# Altium PCB LED板10通道.PcbDoc
Units mm, origin at the board's own origin, x right, y up, seen from the top; angles counter-clockwise.
Board outline 195 x 30 mm, 2 copper layers (Top Layer, Bottom Layer); 71 components, 62 nets, 206 pads, 21 vias.
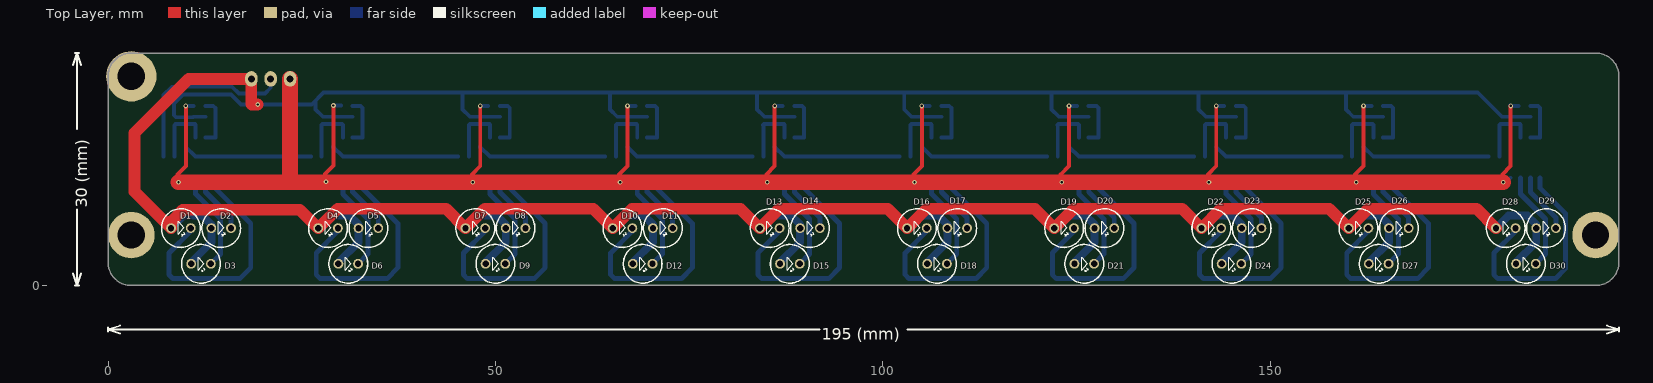
[diagram p0: Top Layer view]
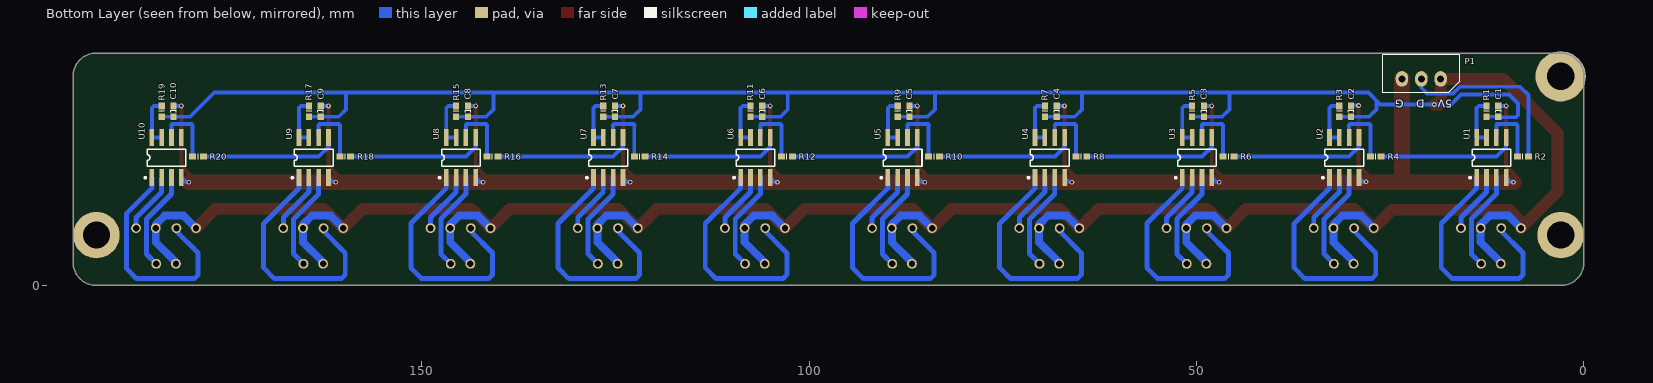
[diagram p1: Bottom Layer view, seen from below]
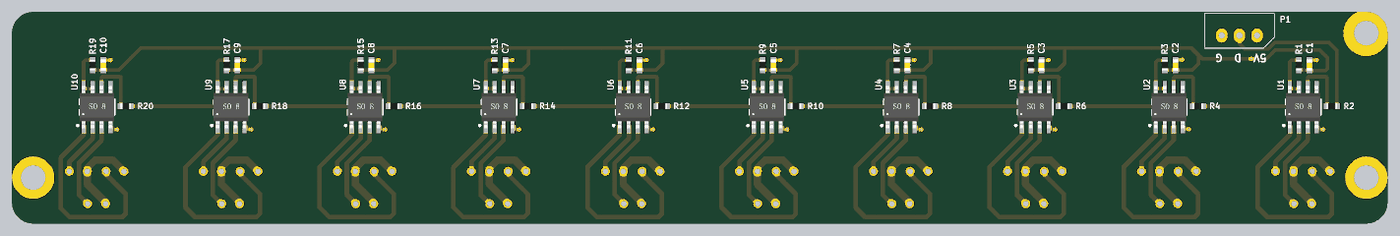
[diagram p2: 3D render of the assembled board from below, using the file's embedded part models]

## Layer stack, top to bottom
Top Solder: solder mask 0.0102, Solder Resist, Dk 3.5
Top Layer: signal copper 0.0356
Dielectric1: dielectric 0.32, FR-4, Dk 4.8
Bottom Layer: signal copper 0.0356
Bottom Solder: solder mask 0.0102, Solder Resist, Dk 3.5

## Board outline
0,3 ccw(c3,3) 3,0 192,0 ccw(c192,3) 195,3 195,27 ccw(c192,27) 192,30 3,30 ccw(c3,27) 0,27

## Design rules (kind name [scope] priority, off if disabled: settings)
Clearance [All] p1: gap=0.254
ComponentClearance [All] p1 off: gap=0.254 collisioncheckmode=3 verticalgap=0.254 showdistances=FALSE
PolygonConnect [All] p1: connectstyle=Direct reliefconductorwidth=0.254 reliefentries=4 polygonreliefangle="90 Angle" airgapwidth=0.254
RoutingVias [All] p1: holewidth=0.711 width=1.27 viastyle="Through Hole" minholewidth=0.711 minwidth=1.27 maxholewidth=0.711 maxwidth=1.27
SilkToSolderMaskClearance SilkscreenOverComponentPads [IsPad] p1: minsilkscreentomaskgap=0.254 clearancetoexposedcopper=TRUE
SolderMaskExpansion [All] p1: expansion=0.102
Width [All] p1: maxlimit=2.54 minlimit=0.203 preferedwidth=0.381
28 further rules are at their usual default settings.

## Components (designator, comment, footprint, x,y, rotation, side; value= is the part's Value field where it differs from the comment)
C1 "100nF" 1608C 11.049,22.479 r270 bottom
C2 "100nF" 1608C 30.049,22.479 r270 bottom (schematic designator C1)
C3 "100nF" 1608C 49.049,22.479 r270 bottom (schematic designator C1)
C4 "100nF" 1608C 68.049,22.479 r270 bottom (schematic designator C1)
C5 "100nF" 1608C 87.049,22.479 r270 bottom (schematic designator C1)
C6 "100nF" 1608C 106.049,22.479 r270 bottom (schematic designator C1)
C7 "100nF" 1608C 125.049,22.479 r270 bottom (schematic designator C1)
C8 "100nF" 1608C 144.049,22.479 r270 bottom (schematic designator C1)
C9 "100nF" 1608C 163.049,22.479 r270 bottom (schematic designator C1)
C10 "100nF" 1608C 182.049,22.479 r270 bottom (schematic designator C1)
D1 "" LEDN/5S 9.4,7.4 r90 top
D2 "" LEDN/5S 14.6,7.4 r90 top
D3 "" LEDN/5S 12,2.8 r90 top
D4 "" LEDN/5S 28.4,7.4 r90 top
D5 "" LEDN/5S 33.6,7.4 r90 top
D6 "" LEDN/5S 31,2.8 r90 top
D7 "" LEDN/5S 47.4,7.4 r90 top
D8 "" LEDN/5S 52.6,7.4 r90 top
D9 "" LEDN/5S 50,2.8 r90 top
D10 "" LEDN/5S 66.4,7.4 r90 top
D11 "" LEDN/5S 71.6,7.4 r90 top
D12 "" LEDN/5S 69,2.8 r90 top
D13 "" LEDN/5S 85.4,7.4 r90 top
D14 "" LEDN/5S 90.6,7.4 r90 top
D15 "" LEDN/5S 88,2.8 r90 top
D16 "" LEDN/5S 104.4,7.4 r90 top
D17 "" LEDN/5S 109.6,7.4 r90 top
D18 "" LEDN/5S 107,2.8 r90 top
D19 "" LEDN/5S 123.4,7.4 r90 top
D20 "" LEDN/5S 128.6,7.4 r90 top
D21 "" LEDN/5S 126,2.8 r90 top
D22 "" LEDN/5S 142.4,7.4 r90 top
D23 "" LEDN/5S 147.6,7.4 r90 top
D24 "" LEDN/5S 145,2.8 r90 top
D25 "" LEDN/5S 161.4,7.4 r90 top
D26 "" LEDN/5S 166.6,7.4 r90 top
D27 "" LEDN/5S 164,2.8 r90 top
D28 "" LEDN/5S 180.4,7.4 r90 top
D29 "" LEDN/5S 185.6,7.4 r90 top
D30 "" LEDN/5S 183,2.8 r90 top
P1 "" 5264-3 23.495,26.67 r0 bottom
R1 "33R" 1608 12.573,22.479 r270 bottom
R2 "33R" 1608 7.874,16.637 r180 bottom
R3 "33R" 1608 31.573,22.479 r270 bottom (schematic designator R1)
R4 "33R" 1608 26.874,16.637 r180 bottom (schematic designator R2)
R5 "33R" 1608 50.573,22.479 r270 bottom (schematic designator R1)
R6 "33R" 1608 45.874,16.637 r180 bottom (schematic designator R2)
R7 "33R" 1608 69.573,22.479 r270 bottom (schematic designator R1)
R8 "33R" 1608 64.874,16.637 r180 bottom (schematic designator R2)
R9 "33R" 1608 88.573,22.479 r270 bottom (schematic designator R1)
R10 "33R" 1608 83.874,16.637 r180 bottom (schematic designator R2)
R11 "33R" 1608 107.573,22.479 r270 bottom (schematic designator R1)
R12 "33R" 1608 102.874,16.637 r180 bottom (schematic designator R2)
R13 "33R" 1608 126.573,22.479 r270 bottom (schematic designator R1)
R14 "33R" 1608 121.874,16.637 r180 bottom (schematic designator R2)
R15 "33R" 1608 145.573,22.479 r270 bottom (schematic designator R1)
R16 "33R" 1608 140.874,16.637 r180 bottom (schematic designator R2)
R17 "33R" 1608 164.573,22.479 r270 bottom (schematic designator R1)
R18 "33R" 1608 159.874,16.637 r180 bottom (schematic designator R2)
R19 "33R" 1608 183.573,22.479 r270 bottom (schematic designator R1)
R20 "33R" 1608 178.874,16.637 r180 bottom (schematic designator R2)
U1 "WS2811" so8 11.938,16.51 r90 bottom
U2 "WS2811" so8 30.938,16.51 r90 bottom (schematic designator U1)
U3 "WS2811" so8 49.938,16.51 r90 bottom (schematic designator U1)
U4 "WS2811" so8 68.938,16.51 r90 bottom (schematic designator U1)
U5 "WS2811" so8 87.938,16.51 r90 bottom (schematic designator U1)
U6 "WS2811" so8 106.938,16.51 r90 bottom (schematic designator U1)
U7 "WS2811" so8 125.938,16.51 r90 bottom (schematic designator U1)
U8 "WS2811" so8 144.938,16.51 r90 bottom (schematic designator U1)
U9 "WS2811" so8 163.938,16.51 r90 bottom (schematic designator U1)
U10 "WS2811" so8 182.938,16.51 r90 bottom (schematic designator U1)

## Footprints (in the part's own frame and the unit in brackets; to place one, negate y for a bottom-side part, rotate by r counter-clockwise, add the part's x,y. Pads: shape width x height; smd on the part's side, far side on the other; paste and mask are expansions set on the pad)
1608 [mm]
  rect 0.9x0.8 smd: 1(-0.7,0) 2(0.7,0)
  silkscreen extent 0,-0.35 0,0.35, body extent -0.75,-0.39 0.75,0.41, height 0.45
1608C [mm]
  rect 0.9x0.8 smd: 1(-0.7,0) 2(0.7,0)
  silkscreen extent -0.1,-0.35 0.1,0.36, body extent -0.8,-0.41 0.8,0.39, height 0.8
5264-3 [mm]
  oval 1.6x2 hole 0.9: 1(0,0) 2(-2.5,0) 3(-5,0)
  silkscreen extent -7.45,-3.1 2.45,1.8
LEDN/5S [mil]
  round 50 hole 32: 1(0,50) 2(0,-50)
  silkscreen extent -98,-98 98,98
so8 [mm]
  rect 2.2x0.6 smd: 1(-2.6,1.905) 2(-2.6,0.635) 3(-2.6,-0.635) 4(-2.6,-1.905) 5(2.6,-1.905) 6(2.6,-0.635) 7(2.6,0.635) 8(2.6,1.905)
  silkscreen extent -2.72,-2.5 1.1,2.88, body extent -3.72,-2.42 3.69,2.48, height 1.7

## Part data
C1 C2 C3 C4 C5 C6 C7 C8 C9 C10: library part Cap, "Capacitor"
D1 D2 D3 D4 D5 D6 D7 D8 D9 D10 D11 D12 D13 D14 D15 D16 D17 D18 D19 D20 D21 D22 D23 D24 D25 D26 D27 D28 D29 D30: library part LED
P1: library part "Header 3", "Header, 3-Pin"
R1 R2 R3 R4 R5 R6 R7 R8 R9 R10 R11 R12 R13 R14 R15 R16 R17 R18 R19 R20: library part Res2, "Resistor"
U1 U2 U3 U4 U5 U6 U7 U8 U9 U10: library part "Header 4X2", "Header, 4-Pin, Dual row"

## Free pads (board coordinates)
  round 6 hole 3.5: 0(3,6.5) 0(192,6.5)
  round 6.5 hole 3.5: 0(3,27)

## Via types
v1: diameter 0.61, hole 0.305, Top Layer to Bottom Layer, 21 vias

## Nets (pads, with @x,y where several pads share a name; then routed paths per layer and width w, separated by ;. In a path a pad name is that pad's centre, name@x,y a point inside that pad or via, vN(x,y) a via of type N, cw(c..) or ccw(c..) an arc to the next point about the centre after c; other vN are vias at no path point)
DIN: P1.2 R2.2 | length 24
  Bottom Layer w0.508: R2.2 7.174,24.573 8.255,25.654 16.002,25.654 16.891,24.765 20.233,24.765 20.995,25.527 P1.2
GND: C1.1 C2.1 C3.1 C4.1 C5.1 C6.1 C7.1 C8.1 C9.1 C10.1 P1.1 U1.4 U2.4 U3.4 U4.4 U5.4 U6.4 U7.4 U8.4 U9.4 U10.4 | length 308
  Top Layer w0.508: 8.959,14.351 10.037,15.429 v1(10.037,23.179) ; v1(28.134,13.383) 28.007,13.51 28.007,14.399 29.085,15.477 v1(29.085,23.227) ; v1(47.086,13.335) 46.959,13.462 46.959,14.351 48.037,15.429 v1(48.037,23.179) ; v1(66.086,13.335) 65.959,13.462 65.959,14.351 67.037,15.429 v1(67.037,23.179) ; v1(85.086,13.335) 84.959,13.462 84.959,14.351 86.037,15.429 v1(86.037,23.179) ; v1(104.086,13.335) 103.959,13.462 103.959,14.351 105.037,15.429 v1(105.037,23.179) ; v1(123.086,13.335) 122.959,13.462 122.959,14.351 124.037,15.429 v1(124.037,23.179) ; v1(142.086,13.335) 141.959,13.462 141.959,14.351 143.037,15.429 v1(143.037,23.179) ; v1(161.086,13.335) 160.959,13.462 160.959,14.351 162.037,15.429 v1(162.037,23.179) ; 179.959,14.351 181.037,15.429 v1(181.037,23.179)
  Top Layer w2.032: v1(9.086,13.335) 22.86,13.335 ; P1.1 23.495,13.97 22.86,13.335 ; v1(180.086,13.335) v1(161.086,13.335) v1(142.086,13.335) v1(123.086,13.335) v1(104.086,13.335) v1(85.086,13.335) v1(66.086,13.335) v1(47.086,13.335) 22.86,13.335
  Bottom Layer w0.508: v1(9.086,13.335) 9.458,13.335 U1.4 ; v1(10.037,23.179) C1.1 ; v1(28.134,13.383) 28.506,13.383 U2.4 U2.4@29.081,13.958 ; v1(29.085,23.227) C2.1@30.097,23.227 ; v1(47.086,13.335) 47.458,13.335 U3.4 ; v1(48.037,23.179) C3.1 ; v1(66.086,13.335) 66.458,13.335 U4.4 ; v1(67.037,23.179) C4.1 ; v1(85.086,13.335) 85.458,13.335 U5.4 ; v1(86.037,23.179) C5.1 ; v1(104.086,13.335) 104.458,13.335 U6.4 ; v1(105.037,23.179) C6.1 ; v1(123.086,13.335) 123.458,13.335 U7.4 ; v1(124.037,23.179) C7.1 ; v1(142.086,13.335) 142.458,13.335 U8.4 ; v1(143.037,23.179) C8.1 ; v1(161.086,13.335) 161.458,13.335 U9.4 ; v1(162.037,23.179) C9.1 ; v1(180.086,13.335) 180.458,13.335 U10.4 ; v1@180.975,23.241 v1(181.037,23.179) C10.1
NetD1_2: D1.2 U1.1 | length 32
  Bottom Layer w0.635: D1.2 10.67,6.987 7.874,4.191 7.874,1.397 8.382,0.889 17.018,0.889 18.415,2.286 18.415,8.001 13.843,12.573 U1.1
NetD2_2: D2.2 U1.2 | length 7.9
  Bottom Layer w0.635: U1.2 12.573,12.065 15.87,8.768 D2.2
NetD3_2: D3.2 U1.3 | length 13
  Bottom Layer w0.635: U1.3 11.303,11.811 14.536,8.578 14.536,4.066 D3.2
NetD4_2: D4.2 U2.1 | length 32
  Bottom Layer w0.635: D4.2 29.67,6.987 26.874,4.191 26.874,1.397 27.382,0.889 36.018,0.889 37.415,2.286 37.415,8.001 32.843,12.573 U2.1
NetD5_2: D5.2 U2.2 | length 7.9
  Bottom Layer w0.635: U2.2 31.573,12.065 34.87,8.768 D5.2
NetD6_2: D6.2 U2.3 | length 13
  Bottom Layer w0.635: U2.3 30.303,11.811 33.536,8.578 33.536,4.066 D6.2
NetD7_2: D7.2 U3.1 | length 32
  Bottom Layer w0.635: D7.2 48.67,6.987 45.874,4.191 45.874,1.397 46.382,0.889 55.018,0.889 56.415,2.286 56.415,8.001 51.843,12.573 U3.1
NetD8_2: D8.2 U3.2 | length 7.9
  Bottom Layer w0.635: U3.2 50.573,12.065 53.87,8.768 D8.2
NetD9_2: D9.2 U3.3 | length 13
  Bottom Layer w0.635: U3.3 49.303,11.811 52.536,8.578 52.536,4.066 D9.2
NetD10_2: D10.2 U4.1 | length 32
  Bottom Layer w0.635: D10.2 67.67,6.987 64.874,4.191 64.874,1.397 65.382,0.889 74.018,0.889 75.415,2.286 75.415,8.001 70.843,12.573 U4.1
NetD11_2: D11.2 U4.2 | length 7.9
  Bottom Layer w0.635: U4.2 69.573,12.065 72.87,8.768 D11.2
NetD12_2: D12.2 U4.3 | length 13
  Bottom Layer w0.635: U4.3 68.303,11.811 71.536,8.578 71.536,4.066 D12.2
NetD13_2: D13.2 U5.1 | length 32
  Bottom Layer w0.635: D13.2 86.67,6.987 83.874,4.191 83.874,1.397 84.382,0.889 93.018,0.889 94.415,2.286 94.415,8.001 89.843,12.573 U5.1
NetD14_2: D14.2 U5.2 | length 7.9
  Bottom Layer w0.635: U5.2 88.573,12.065 91.87,8.768 D14.2
NetD15_2: D15.2 U5.3 | length 13
  Bottom Layer w0.635: U5.3 87.303,11.811 90.536,8.578 90.536,4.066 D15.2
NetD16_2: D16.2 U6.1 | length 32
  Bottom Layer w0.635: D16.2 105.67,6.987 102.874,4.191 102.874,1.397 103.382,0.889 112.018,0.889 113.415,2.286 113.415,8.001 108.843,12.573 U6.1
NetD17_2: D17.2 U6.2 | length 7.9
  Bottom Layer w0.635: U6.2 107.573,12.065 110.87,8.768 D17.2
NetD18_2: D18.2 U6.3 | length 13
  Bottom Layer w0.635: U6.3 106.303,11.811 109.536,8.578 109.536,4.066 D18.2
NetD19_2: D19.2 U7.1 | length 32
  Bottom Layer w0.635: D19.2 124.67,6.987 121.874,4.191 121.874,1.397 122.382,0.889 131.018,0.889 132.415,2.286 132.415,8.001 127.843,12.573 U7.1
NetD20_2: D20.2 U7.2 | length 7.9
  Bottom Layer w0.635: U7.2 126.573,12.065 129.87,8.768 D20.2
NetD21_2: D21.2 U7.3 | length 13
  Bottom Layer w0.635: U7.3 125.303,11.811 128.536,8.578 128.536,4.066 D21.2
NetD22_2: D22.2 U8.1 | length 32
  Bottom Layer w0.635: D22.2 143.67,6.987 140.874,4.191 140.874,1.397 141.382,0.889 150.018,0.889 151.415,2.286 151.415,8.001 146.843,12.573 U8.1
NetD23_2: D23.2 U8.2 | length 7.9
  Bottom Layer w0.635: U8.2 145.573,12.065 148.87,8.768 D23.2
NetD24_2: D24.2 U8.3 | length 13
  Bottom Layer w0.635: U8.3 144.303,11.811 147.536,8.578 147.536,4.066 D24.2
NetD25_2: D25.2 U9.1 | length 32
  Bottom Layer w0.635: D25.2 162.67,6.987 159.874,4.191 159.874,1.397 160.382,0.889 169.018,0.889 170.415,2.286 170.415,8.001 165.843,12.573 U9.1
NetD26_2: D26.2 U9.2 | length 7.9
  Bottom Layer w0.635: U9.2 164.573,12.065 167.87,8.768 D26.2
NetD27_2: D27.2 U9.3 | length 13
  Bottom Layer w0.635: U9.3 163.303,11.811 166.536,8.578 166.536,4.066 D27.2
NetD28_2: D28.2 U10.1 | length 30.2
  Bottom Layer w0.635: D28.2 181.67,6.987 178.874,4.191 178.874,1.397 179.382,0.889 186.817,0.889 188.087,2.159 188.087,9.329 184.843,12.573 U10.1
NetD29_2: D29.2 U10.2 | length 7.9
  Bottom Layer w0.635: U10.2 183.573,12.065 186.87,8.768 D29.2
NetD30_2: D30.2 U10.3 | length 13
  Bottom Layer w0.635: U10.3 182.303,11.811 185.536,8.578 185.536,4.066 D30.2
NetR1_1: R1.1 U1.7 U1.8 | length 6.5
  Bottom Layer w0.508: U1.7 U1.8 13.843,22.91 13.574,23.179 R1.1
NetR2_1: R2.1 U1.6 | length 10.8
  Bottom Layer w0.508: R2.1 8.574,20.686 ; 8.686,20.828 10.432,20.828 10.439,20.821 ; 10.439,20.821 11.226,20.821 ; 10.439,20.821 11.226,20.821 ; 11.226,20.821 11.303,20.744 ; 11.303,20.744 U1.6 11.303,20.744
NetR3_1: R3.1 U2.7 U2.8 | length 6.5
  Bottom Layer w0.508: U2.7 U2.8 32.843,22.91 32.574,23.179 R3.1
NetR4_1: R4.1 U2.6 | length 8.5
  Bottom Layer w0.508: R4.1 27.574,20.686 27.559,20.701 27.686,20.828 29.432,20.828 29.439,20.821 30.226,20.821 30.303,20.744 U2.6
NetR4_2: R4.2 U1.5 | length 17.9
  Bottom Layer w0.508: U1.5 10.033,17.902 11.298,16.637 R4.2
NetR5_1: R5.1 U3.7 U3.8 | length 6.5
  Bottom Layer w0.508: U3.7 U3.8 51.843,22.91 51.574,23.179 R5.1
NetR6_1: R6.1 U3.6 | length 8.5
  Bottom Layer w0.508: R6.1 46.574,20.686 46.559,20.701 46.686,20.828 48.432,20.828 48.439,20.821 49.226,20.821 49.303,20.744 U3.6
NetR6_2: R6.2 U2.5 | length 16.7
  Bottom Layer w0.508: 29.033,17.902 30.298,16.637 R6.2
NetR7_1: R7.1 U4.7 U4.8 | length 6.5
  Bottom Layer w0.508: U4.7 U4.8 70.843,22.91 70.574,23.179 R7.1
NetR8_1: R8.1 U4.6 | length 8.5
  Bottom Layer w0.508: R8.1 65.574,20.686 65.559,20.701 65.686,20.828 67.432,20.828 67.439,20.821 68.226,20.821 68.303,20.744 U4.6
NetR8_2: R8.2 U3.5 | length 16.7
  Bottom Layer w0.508: 48.033,17.902 49.298,16.637 R8.2
NetR9_1: R9.1 U5.7 U5.8 | length 6.5
  Bottom Layer w0.508: U5.7 U5.8 89.843,22.91 89.574,23.179 R9.1
NetR10_1: R10.1 U5.6 | length 8.5
  Bottom Layer w0.508: R10.1 84.574,20.686 84.559,20.701 84.686,20.828 86.432,20.828 86.439,20.821 87.226,20.821 87.303,20.744 U5.6
NetR11_1: R11.1 U6.7 U6.8 | length 6.5
  Bottom Layer w0.508: U6.7 U6.8 108.843,22.91 108.574,23.179 R11.1
NetR12_1: R12.1 U6.6 | length 8.5
  Bottom Layer w0.508: R12.1 103.574,20.686 103.559,20.701 103.686,20.828 105.432,20.828 105.439,20.821 106.226,20.821 106.303,20.744 U6.6
NetR12_2: R12.2 U5.5 | length 16.7
  Bottom Layer w0.508: 86.033,17.902 87.298,16.637 R12.2
NetR13_1: R13.1 U7.7 U7.8 | length 6.5
  Bottom Layer w0.508: U7.7 U7.8 127.843,22.91 127.574,23.179 R13.1
NetR14_1: R14.1 U7.6 | length 8.5
  Bottom Layer w0.508: R14.1 122.574,20.686 122.559,20.701 122.686,20.828 124.432,20.828 124.439,20.821 125.226,20.821 125.303,20.744 U7.6
NetR14_2: R14.2 U6.5 | length 16.7
  Bottom Layer w0.508: 105.033,17.902 106.298,16.637 R14.2
NetR15_1: R15.1 U8.7 U8.8 | length 6.5
  Bottom Layer w0.508: U8.7 U8.8 146.843,22.91 146.574,23.179 R15.1
NetR16_1: R16.1 U8.6 | length 8.5
  Bottom Layer w0.508: R16.1 141.574,20.686 141.559,20.701 141.686,20.828 143.432,20.828 143.439,20.821 144.226,20.821 144.303,20.744 U8.6
NetR16_2: R16.2 U7.5 | length 16.7
  Bottom Layer w0.508: 124.033,17.902 125.298,16.637 R16.2
NetR17_1: R17.1 U9.7 U9.8 | length 6.5
  Bottom Layer w0.508: U9.7 U9.8 165.843,22.91 165.574,23.179 R17.1
NetR18_1: R18.1 U9.6 | length 8.5
  Bottom Layer w0.508: R18.1 160.574,20.686 160.559,20.701 160.686,20.828 162.432,20.828 162.439,20.821 163.226,20.821 163.303,20.744 U9.6
NetR18_2: R18.2 U8.5 | length 16.7
  Bottom Layer w0.508: 143.033,17.902 144.298,16.637 R18.2
NetR19_1: R19.1 U10.7 U10.8 | length 6.5
  Bottom Layer w0.508: U10.7 U10.8 184.843,22.91 184.574,23.179 R19.1
NetR20_1: R20.1 U10.6 | length 8.5
  Bottom Layer w0.508: R20.1 179.574,20.686 179.559,20.701 179.686,20.828 181.432,20.828 181.439,20.821 182.226,20.821 182.303,20.744 U10.6
NetR20_2: R20.2 U9.5 | length 16.7
  Bottom Layer w0.508: 162.033,17.902 163.298,16.637 R20.2
OUT: U10.5
VDD: C1.2 C2.2 C3.2 C4.2 C5.2 C6.2 C7.2 C8.2 C9.2 C10.2 D1.1 D2.1 D3.1 D4.1 D5.1 D6.1 D7.1 D8.1 D9.1 D10.1 D11.1 D12.1 D13.1 D14.1 D15.1 D16.1 D17.1 D18.1 D19.1 D20.1 D21.1 D22.1 D23.1 D24.1 D25.1 D26.1 D27.1 D28.1 D29.1 D30.1 P1.3 R1.2 R3.2 R5.2 R7.2 R9.2 R11.2 R13.2 R15.2 R17.2 R19.2 | length 591.9
  Top Layer w1.524: v1(19.304,23.368) 18.542,23.368 18.495,23.415 P1.3 10.414,26.67 3.429,19.685 3.429,12.101 D1.1 8.13,8.257 9.652,9.779 24.751,9.779 D4.1 29.636,9.906 43.624,9.906 D7.1 48.636,9.906 62.624,9.906 D10.1 67.636,9.906 81.624,9.906 D13.1 86.636,9.906 100.624,9.906 D16.1 105.636,9.906 119.624,9.906 D19.1 124.636,9.906 138.624,9.906 D22.1 143.636,9.906 157.624,9.906 D25.1 162.636,9.906 176.624,9.906 D28.1
  Bottom Layer w0.508: R1.2 C1.2 10.987,21.717 8.763,21.717 8.509,21.971 8.509,23.495 9.652,24.638 15.875,24.638 17.145,23.368 v1(19.304,23.368) 26.289,23.368 27.813,24.892 159.893,24.892 ; 26.766,23.622 26.766,22.733 27.72,21.779 C2.2 R3.2 ; 45.766,24.765 45.766,22.733 46.72,21.779 C3.2 R5.2 ; 64.766,24.765 64.766,22.733 65.72,21.779 C4.2 R7.2 ; 83.766,24.765 83.766,22.733 84.72,21.779 C5.2 R9.2 ; 102.766,24.765 102.766,22.733 103.72,21.779 C6.2 R11.2 ; 121.766,24.765 121.766,22.733 122.72,21.779 C7.2 R13.2 ; 140.766,24.765 140.766,22.733 141.72,21.779 C8.2 R15.2 ; R17.2 C9.2 160.72,21.779 159.766,22.733 159.766,24.765 159.893,24.892 ; R19.2 C10.2 179.897,21.779 176.784,24.892 159.893,24.892
  Bottom Layer w1.016: D1.1 9.747,9.017 12.192,9.017 13.33,7.879 D2.1 13.33,5.583 10.73,2.983 D3.1 ; D4.1 28.747,9.017 31.192,9.017 32.33,7.879 D5.1 32.33,5.583 29.73,2.983 D6.1 ; D7.1 47.747,9.017 50.192,9.017 51.33,7.879 D8.1 51.33,5.583 48.73,2.983 D9.1 ; D10.1 66.747,9.017 69.192,9.017 70.33,7.879 D11.1 70.33,5.583 67.73,2.983 D12.1 ; D13.1 85.747,9.017 88.192,9.017 89.33,7.879 D14.1 89.33,5.583 86.73,2.983 D15.1 ; D16.1 104.747,9.017 107.192,9.017 108.33,7.879 D17.1 108.33,5.583 105.73,2.983 D18.1 ; D19.1 123.747,9.017 126.192,9.017 127.33,7.879 D20.1 127.33,5.583 124.73,2.983 D21.1 ; D22.1 142.747,9.017 145.192,9.017 146.33,7.879 D23.1 146.33,5.583 143.73,2.983 D24.1 ; D25.1 161.747,9.017 164.192,9.017 165.33,7.879 D26.1 165.33,5.583 162.73,2.983 D27.1 ; D28.1 180.747,9.017 183.192,9.017 184.33,7.879 D29.1 184.33,5.583 181.73,2.983 D30.1
pads on no net: R10.2 U4.5
copper on no net: | length 16.7
  Bottom Layer w0.508: 67.033,17.902 68.298,16.637 83.174,16.637

## Silkscreen, mask and mechanical layers (free items; w line width, h text height)
Top Overlay:
  lines w0.254: -4.508,1.524 -4,0 ; -4.508,28.476 -4,30 ; -4.254,0 -3.746,0 ; -4.254,30 -3.746,30 ; -4,9.801 -4,0 ; -4,20.199 -4,30 ; -3.492,1.524 -4,0 ; -3.492,28.476 -4,30 ; 0,-5.954 0,-5.446 ; 1.524,-6.208 0,-5.7 ; 1.524,-5.192 0,-5.7 ; 91.844,-5.7 0,-5.7 ; 103.156,-5.7 195,-5.7 ; 193.476,-6.208 195,-5.7 ; 193.476,-5.192 195,-5.7 ; 195,-5.954 195,-5.446
  text "30 (mm)" at -2.687,10.055 h1.52 r90
  text "195 (mm)" at 92.098,-7.013 h1.52
Bottom Overlay:
  text "5V" at 17.018,24.003 h1.02 r180
  text "D" at 20.574,24.003 h1.02 r180
  text "G" at 23.241,24.003 h1.02 r180
Mechanical 1:
  the board outline again, w0.15